# Altium PCB fsh.PcbDoc
Units mil, origin at the board's own origin, x right, y up, seen from the top; angles counter-clockwise.
Board outline 2500 x 2500 mil, 2 copper layers (Top Layer, Bottom Layer); 6 components, 2 nets, 25 pads, 44 vias.
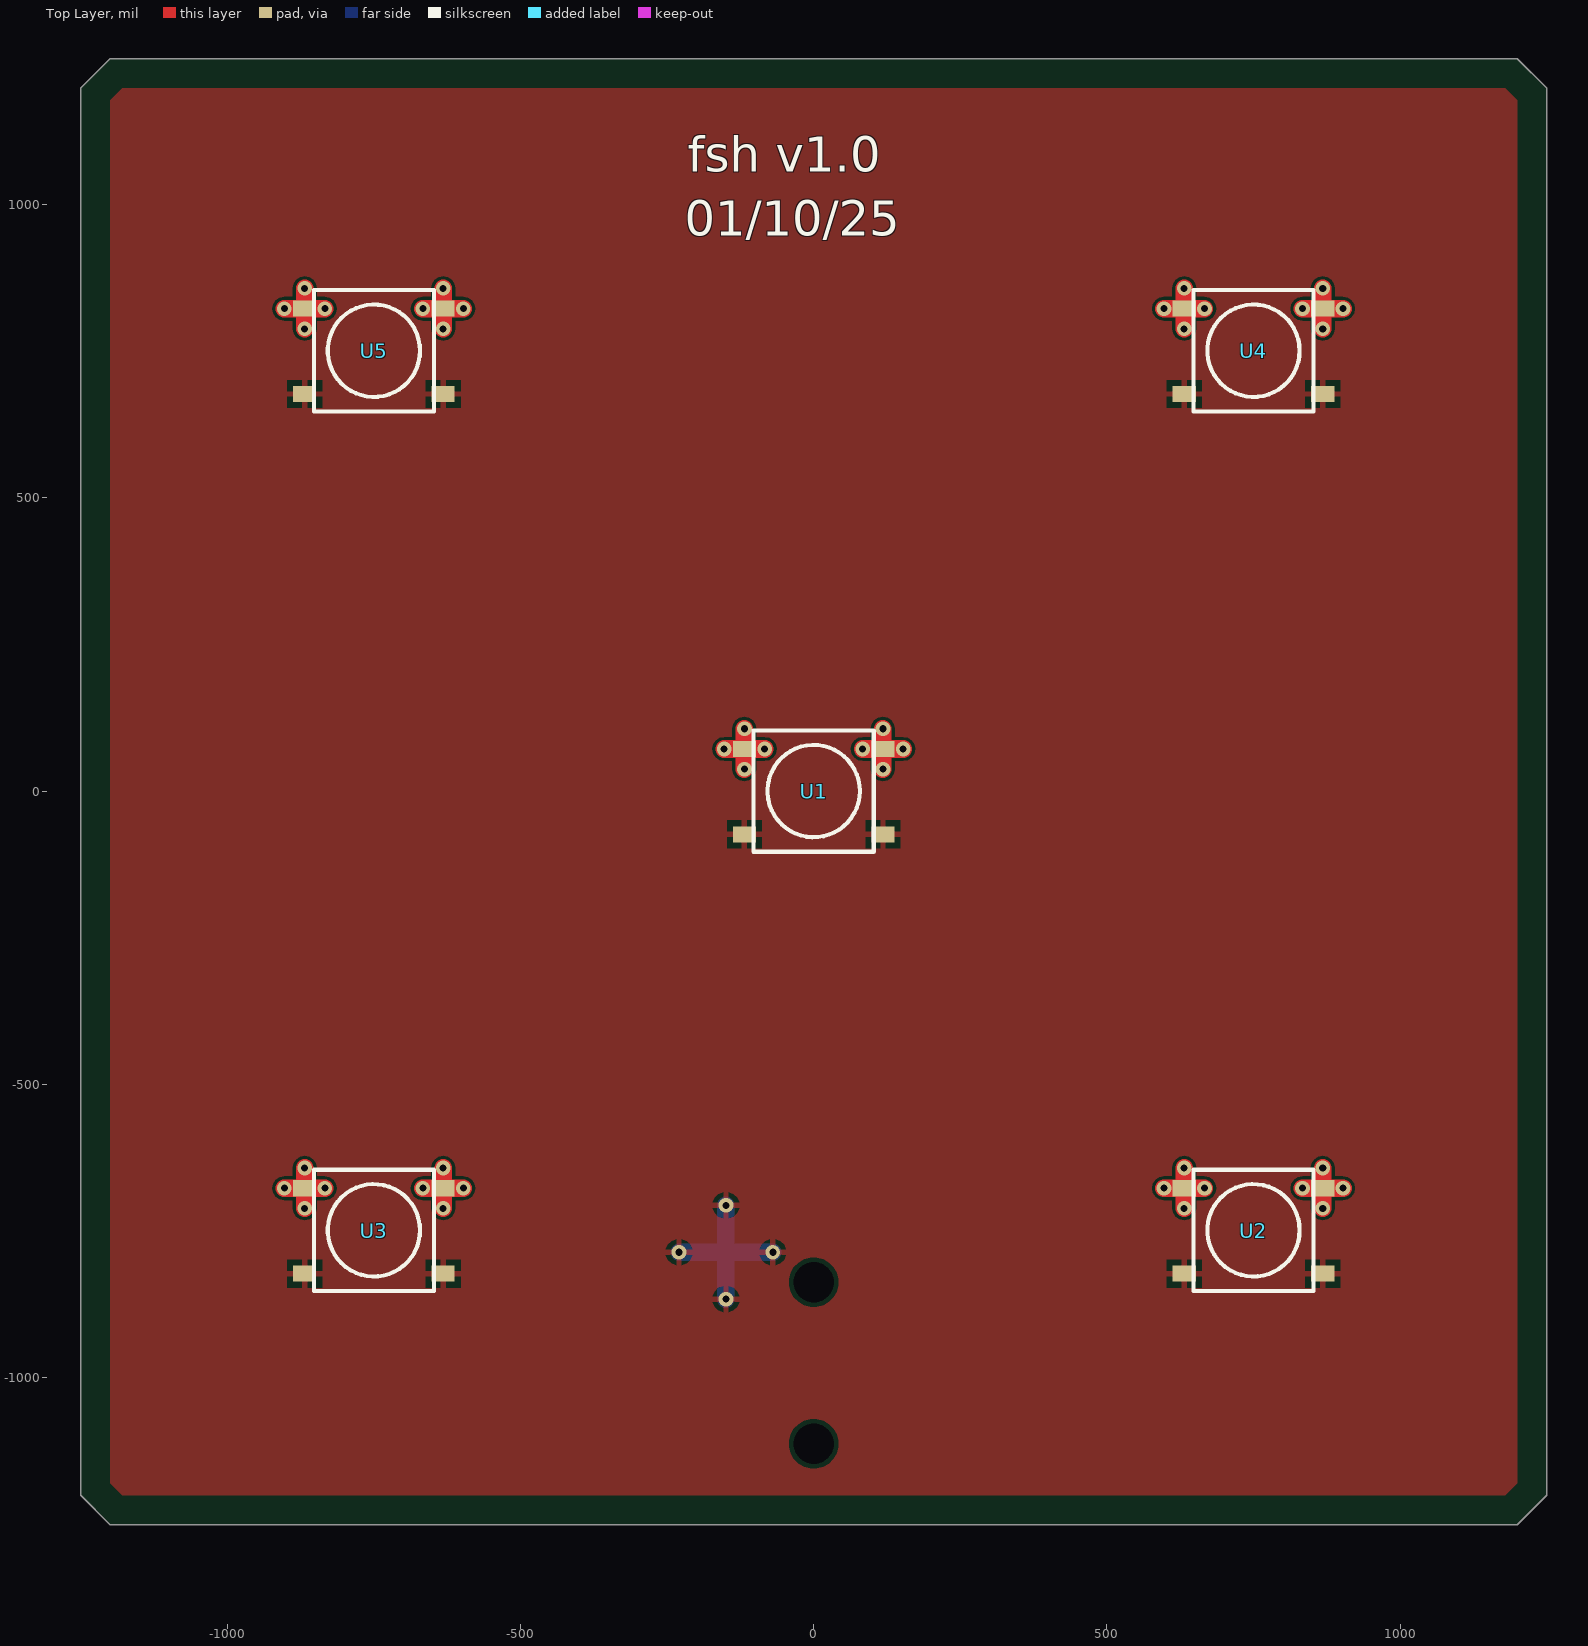
[diagram p0: Top Layer view]
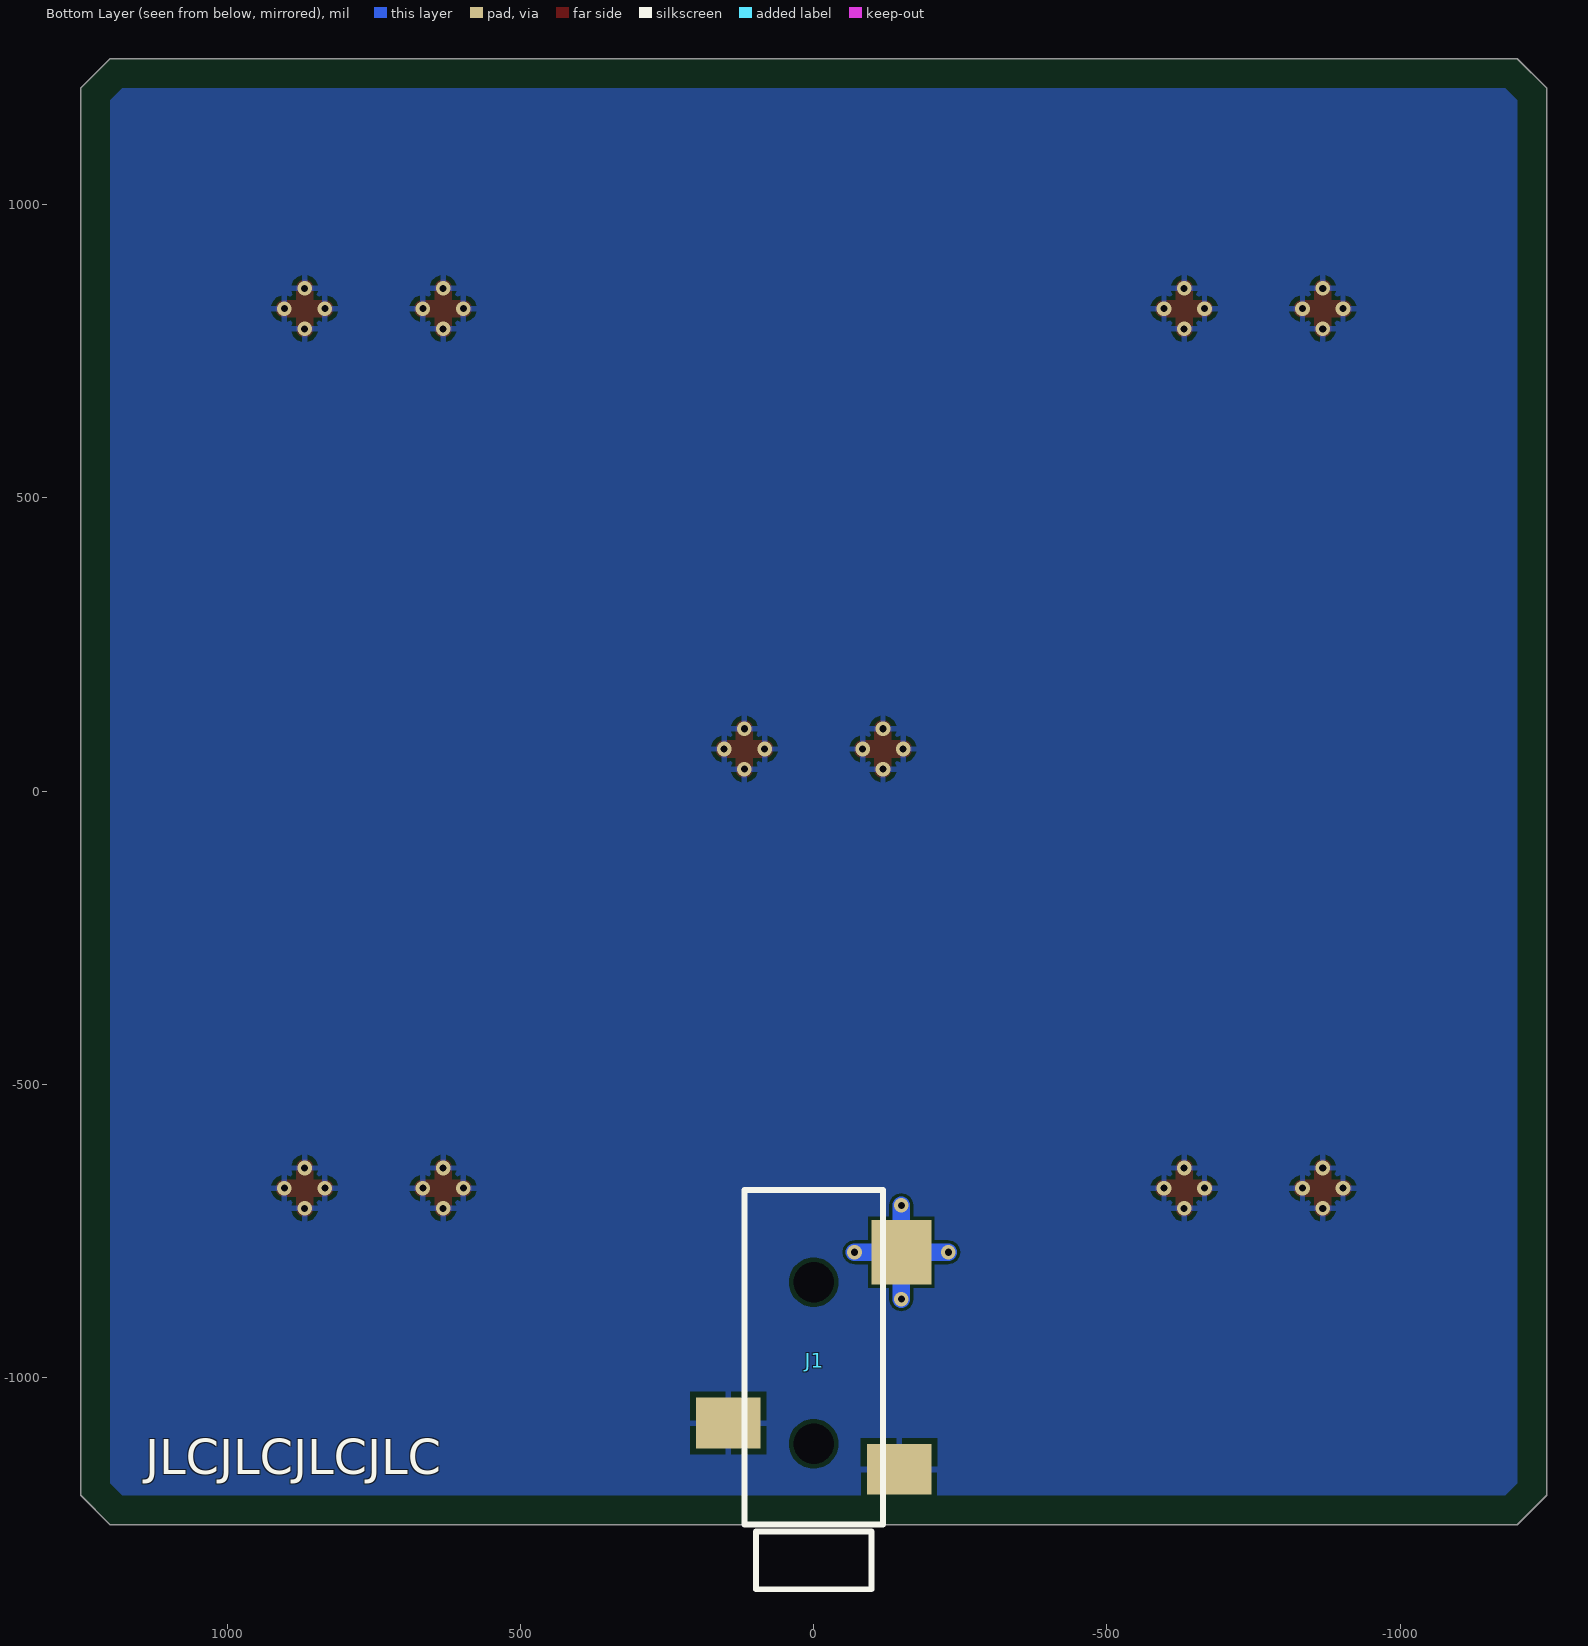
[diagram p1: Bottom Layer view, seen from below]

## Layer stack, top to bottom
Top Solder: solder mask 0.4, Solder Resist, Dk 3.5
Top Layer: signal copper 1.4
Dielectric 1: dielectric 12.6, FR-4, Dk 4.8
Bottom Layer: signal copper 1.4
Bottom Solder: solder mask 0.4, Solder Resist, Dk 3.5

## Board outline
-1250,-1200.98 -1250,1199.02 -1200,1249.02 1200,1249.02 1250,1199.02 1250,-1200.98 1200,-1250.98 -1200,-1250.98

## Design rules (kind name [scope] priority, off if disabled: settings)
BoardOutlineClearance BoardOutlineClearance_1 [not OnLayer('Top Overlay')] p1: gap=15 ignorepadtopadclearanceinfootprint=FALSE except(0: Arc-SplitContinuation Track-SplitContinuation SMDPad-SplitContinuation THPad-SplitContinuation Via-SplitContinuation Fill-SplitContinuation Poly-SplitContinuation Region-SplitContinuation Text-SplitContinuation; 50: Poly-OutlineEdge; 75: Poly-CutoutEdge)
Clearance [All] p1: gap=5 ignorepadtopadclearanceinfootprint=FALSE except(7.5: Arc-Hole Track-Hole SMDPad-Hole THPad-Hole Via-Hole Fill-Hole Poly-Hole Region-Hole Text-Hole)
ComponentClearance [All] p1 off: gap=10 collisioncheckmode=3 verticalgap=10 showdistances=FALSE
DiffPairsRouting [All] p1: maxlimit=5.5 minlimit=4.5 mostfreqgap=5 toplayer_minwidth=7 toplayer_maxwidth=8 toplayer_prefwidth=7.5 bottomlayer_minwidth=7 bottomlayer_maxwidth=8 bottomlayer_prefwidth=7.5 maxuncoupledlength=500
FabricationTestPointUsage TestPointUsage [All] p1: valid=0 allowmultiple=FALSE
FabricationTestpoint Testpoint [All] p1: side=3 testpointundercomponent=TRUE minsize=40 maxsize=100 preferedsize=60 minholesize=0 maxholesize=40 preferedholesize=32 testpointgrid=1 allowsidetop=TRUE allowsidebottom=TRUE usegrid=TRUE gridtolerance=0.01
MatchedLengths [All] p1: tolerance=100 checknetsindiffpair=TRUE checkdiffpairvsdiffpair=FALSE checkxsignals=FALSE checkothers=FALSE
MinimumSolderMaskSliver [All] p1: minsoldermaskwidth=0
PlaneClearance [All] p1: clearance=7.5
PlaneConnect [All] p1: pad.planeconnectstyle=Relief pad.reliefexpansion=20 pad.reliefentries=4 pad.reliefconductorwidth=10 pad.reliefairgap=10 via.planeconnectstyle=Direct via.reliefexpansion=20 via.reliefentries=4 via.reliefconductorwidth=10 via.reliefairgap=10
PolygonConnect PolygonConnect_4 [All vs IsNamedPolygon('TIP_L02_P001')] p1: thpad.connectstyle=Relief thpad.reliefconductorwidth=20 thpad.reliefentries=4 thpad.polygonreliefangle="90 Angle" thpad.airgapwidth=10 smdpad.connectstyle=Relief smdpad.reliefconductorwidth=10 smdpad.reliefentries=4 smdpad.polygonreliefangle="90 Angle" smdpad.airgapwidth=10 via.connectstyle=Relief via.reliefconductorwidth=10 via.reliefentries=4 via.polygonreliefangle="90 Angle" via.airgapwidth=10
PolygonConnect PolygonConnect_3 [All vs IsNamedPolygon('TIP_L02_P001')] p2: thpad.connectstyle=Relief thpad.reliefconductorwidth=20 thpad.reliefentries=4 thpad.polygonreliefangle="90 Angle" thpad.airgapwidth=10 smdpad.connectstyle=Relief smdpad.reliefconductorwidth=10 smdpad.reliefentries=4 smdpad.polygonreliefangle="90 Angle" smdpad.airgapwidth=10 via.connectstyle=Relief via.reliefconductorwidth=10 via.reliefentries=4 via.polygonreliefangle="90 Angle" via.airgapwidth=10
PolygonConnect PolygonConnect_2 [All vs IsNamedPolygon('SLEEVE_L01_P000')] p3: thpad.connectstyle=Relief thpad.reliefconductorwidth=20 thpad.reliefentries=4 thpad.polygonreliefangle="90 Angle" thpad.airgapwidth=10 smdpad.connectstyle=Relief smdpad.reliefconductorwidth=10 smdpad.reliefentries=4 smdpad.polygonreliefangle="90 Angle" smdpad.airgapwidth=10 via.connectstyle=Relief via.reliefconductorwidth=10 via.reliefentries=4 via.polygonreliefangle="90 Angle" via.airgapwidth=10
PolygonConnect PolygonConnect_1 [All vs IsNamedPolygon('SLEEVE_L01_P000') Or IsNamedPolygon('TIP_L02_P001')] p4: thpad.connectstyle=Relief thpad.reliefconductorwidth=20 thpad.reliefentries=4 thpad.polygonreliefangle="90 Angle" thpad.airgapwidth=10 smdpad.connectstyle=Relief smdpad.reliefconductorwidth=10 smdpad.reliefentries=4 smdpad.polygonreliefangle="90 Angle" smdpad.airgapwidth=10 via.connectstyle=Relief via.reliefconductorwidth=10 via.reliefentries=4 via.polygonreliefangle="90 Angle" via.airgapwidth=10
PolygonConnect [All] p5: connectstyle=Relief reliefconductorwidth=10 reliefentries=4 polygonreliefangle="90 Angle" airgapwidth=10
RoutingVias [All] p1: holewidth=12 width=24 viastyle="Through Hole" minholewidth=12 minwidth=24 maxholewidth=12 maxwidth=24
SolderMaskExpansion [All] p1: expansion=1.97 istentingtop=FALSE
Width [All] p1: maxlimit=100 minlimit=5 preferedwidth=5 minimp=50.000000 maximp=50.000000 favimp=50.000000
23 further rules are at their usual default settings.

## Components (designator, comment, footprint, x,y, rotation, side; value= is the part's Value field where it differs from the comment)
J1 "SJ-3523" SJ-352X 0,-1250.98 r90 bottom
U1 "SW_4118" SW_4118_FLAT 0,-0.98 r0 top
U2 "SW_4118" SW_4118_FLAT 750,-750 r0 top
U3 "SW_4118" SW_4118_FLAT -750,-750 r0 top
U4 "SW_4118" SW_4118_FLAT 750,750 r0 top
U5 "SW_4118" SW_4118_FLAT -750,750 r0 top

## Footprints (in the part's own frame and the unit in brackets; to place one, negate y for a bottom-side part, rotate by r counter-clockwise, add the part's x,y. Pads: shape width x height; smd on the part's side, far side on the other; paste and mask are expansions set on the pad)
SJ-352X [mm]
  rect 2.2x2.8 smd: 1(2.4,-3.7) 3(4.4,3.7)
  rect 2.8x2.6 smd: 2(11.8,-3.8)
  round 0 hole 1.75 unplated: ""(3.5,0) ""(10.5,0)
  silkscreen extent -2.8,-3 14.5,3
SW_4118_FLAT [mm]
  rect 1x0.7 smd: 1(-3,1.85) 2(3,1.85) 3(-3,-1.85) 4(3,-1.85)
  silkscreen extent -2.6,-2.6 2.6,2.65

## Via types
v1: diameter 25, hole 12, Top Layer to Bottom Layer, tented both sides, 44 vias

## Nets (pads, with @x,y where several pads share a name; then routed paths per layer and width w, separated by ;. In a path a pad name is that pad's centre, name@x,y a point inside that pad or via, vN(x,y) a via of type N, cw(c..) or ccw(c..) an arc to the next point about the centre after c; other vN are vias at no path point)
S_R: J1.1 J1.3 U1.1 U1.2 U2.1 U2.2 U3.1 U3.2 U4.1 U4.2 U5.1 U5.2 | length 1380
  Top Layer w30: v1(-902.61,-677.17) U3.1 ; v1(-902.61,822.83) U5.1 ; v1(-868.11,-711.67) U3.1 ; v1(-868.11,-642.67) U3.1 ; v1(-868.11,788.33) U5.1 ; v1(-868.11,857.33) U5.1 ; v1(-833.61,-677.17) U3.1 ; v1(-833.61,822.83) U5.1 ; v1(-666.39,-677.17) U3.2 ; v1(-666.39,822.83) U5.2 ; v1(-631.89,-711.67) U3.2 ; v1(-631.89,-642.67) U3.2 ; v1(-631.89,788.33) U5.2 ; v1(-631.89,857.33) U5.2 ; v1(-597.39,-677.17) U3.2 ; v1(-597.39,822.83) U5.2 ; v1(-152.61,71.85) U1.1 ; v1(-118.11,37.35) U1.1 ; v1(-118.11,106.35) U1.1 ; v1(-83.61,71.85) U1.1 ; v1(83.61,71.85) U1.2 ; v1(118.11,37.35) U1.2 ; v1(118.11,106.35) U1.2 ; v1(152.61,71.85) U1.2 ; v1(597.39,-677.17) U2.1 ; v1(597.39,822.83) U4.1 ; v1(631.89,-711.67) U2.1 ; v1(631.89,-642.67) U2.1 ; v1(631.89,788.33) U4.1 ; v1(631.89,857.33) U4.1 ; v1(666.39,-677.17) U2.1 ; v1(666.39,822.83) U4.1 ; v1(833.61,-677.17) U2.2 ; v1(833.61,822.83) U4.2 ; v1(868.11,-711.67) U2.2 ; v1(868.11,-642.67) U2.2 ; v1(868.11,788.33) U4.2 ; v1(868.11,857.33) U4.2 ; v1(902.61,-677.17) U2.2 ; v1(902.61,822.83) U4.2
T: J1.2 U1.3 U1.4 U2.3 U2.4 U3.3 U3.4 U4.3 U4.4 U5.3 U5.4 | length 319.8
  Bottom Layer w30: v1(-229.56,-786.42) J1.2 ; v1(-149.61,-866.37) J1.2 ; v1(-149.61,-706.46) J1.2 ; v1(-69.65,-786.42) J1.2
pads on no net: J1.

## Polygon pours and split planes (outlines as drawn)
T on Top Layer "T_L01_P002" (solid, pour order 2): -1250,-1200.98 -1250,1199.02 -1200,1249.02 1200,1249.02 1250,1199.02 1250,-1200.98 1200,-1250.98 -1200,-1250.98
S_R on Bottom Layer "S_R_L02_P003" (solid, pour order 3): -1250,-1200.98 -1250,1199.02 -1200,1249.02 1200,1249.02 1250,1199.02 1250,-1200.98 1200,-1250.98 -1200,-1250.98

## Silkscreen, mask and mechanical layers (free items; w line width, h text height)
Top Overlay:
  text "fsh v1.0" at -214.93,1056.03 h60
  text "01/10/25" at -219.93,946.92 h60
Bottom Overlay:
  text "JLCJLCJLCJLC" at 1140,-1165 h60
Mechanical 1:
  the board outline again, w5